# Altium PCB PCBdraft1.PcbDoc
Units mm, origin at the board's own origin, x right, y up, seen from the top; angles counter-clockwise.
Board outline 100 x 100 mm, 2 copper layers (Top Layer, Bottom Layer); 11 components, 31 nets, 128 pads, 9 vias.
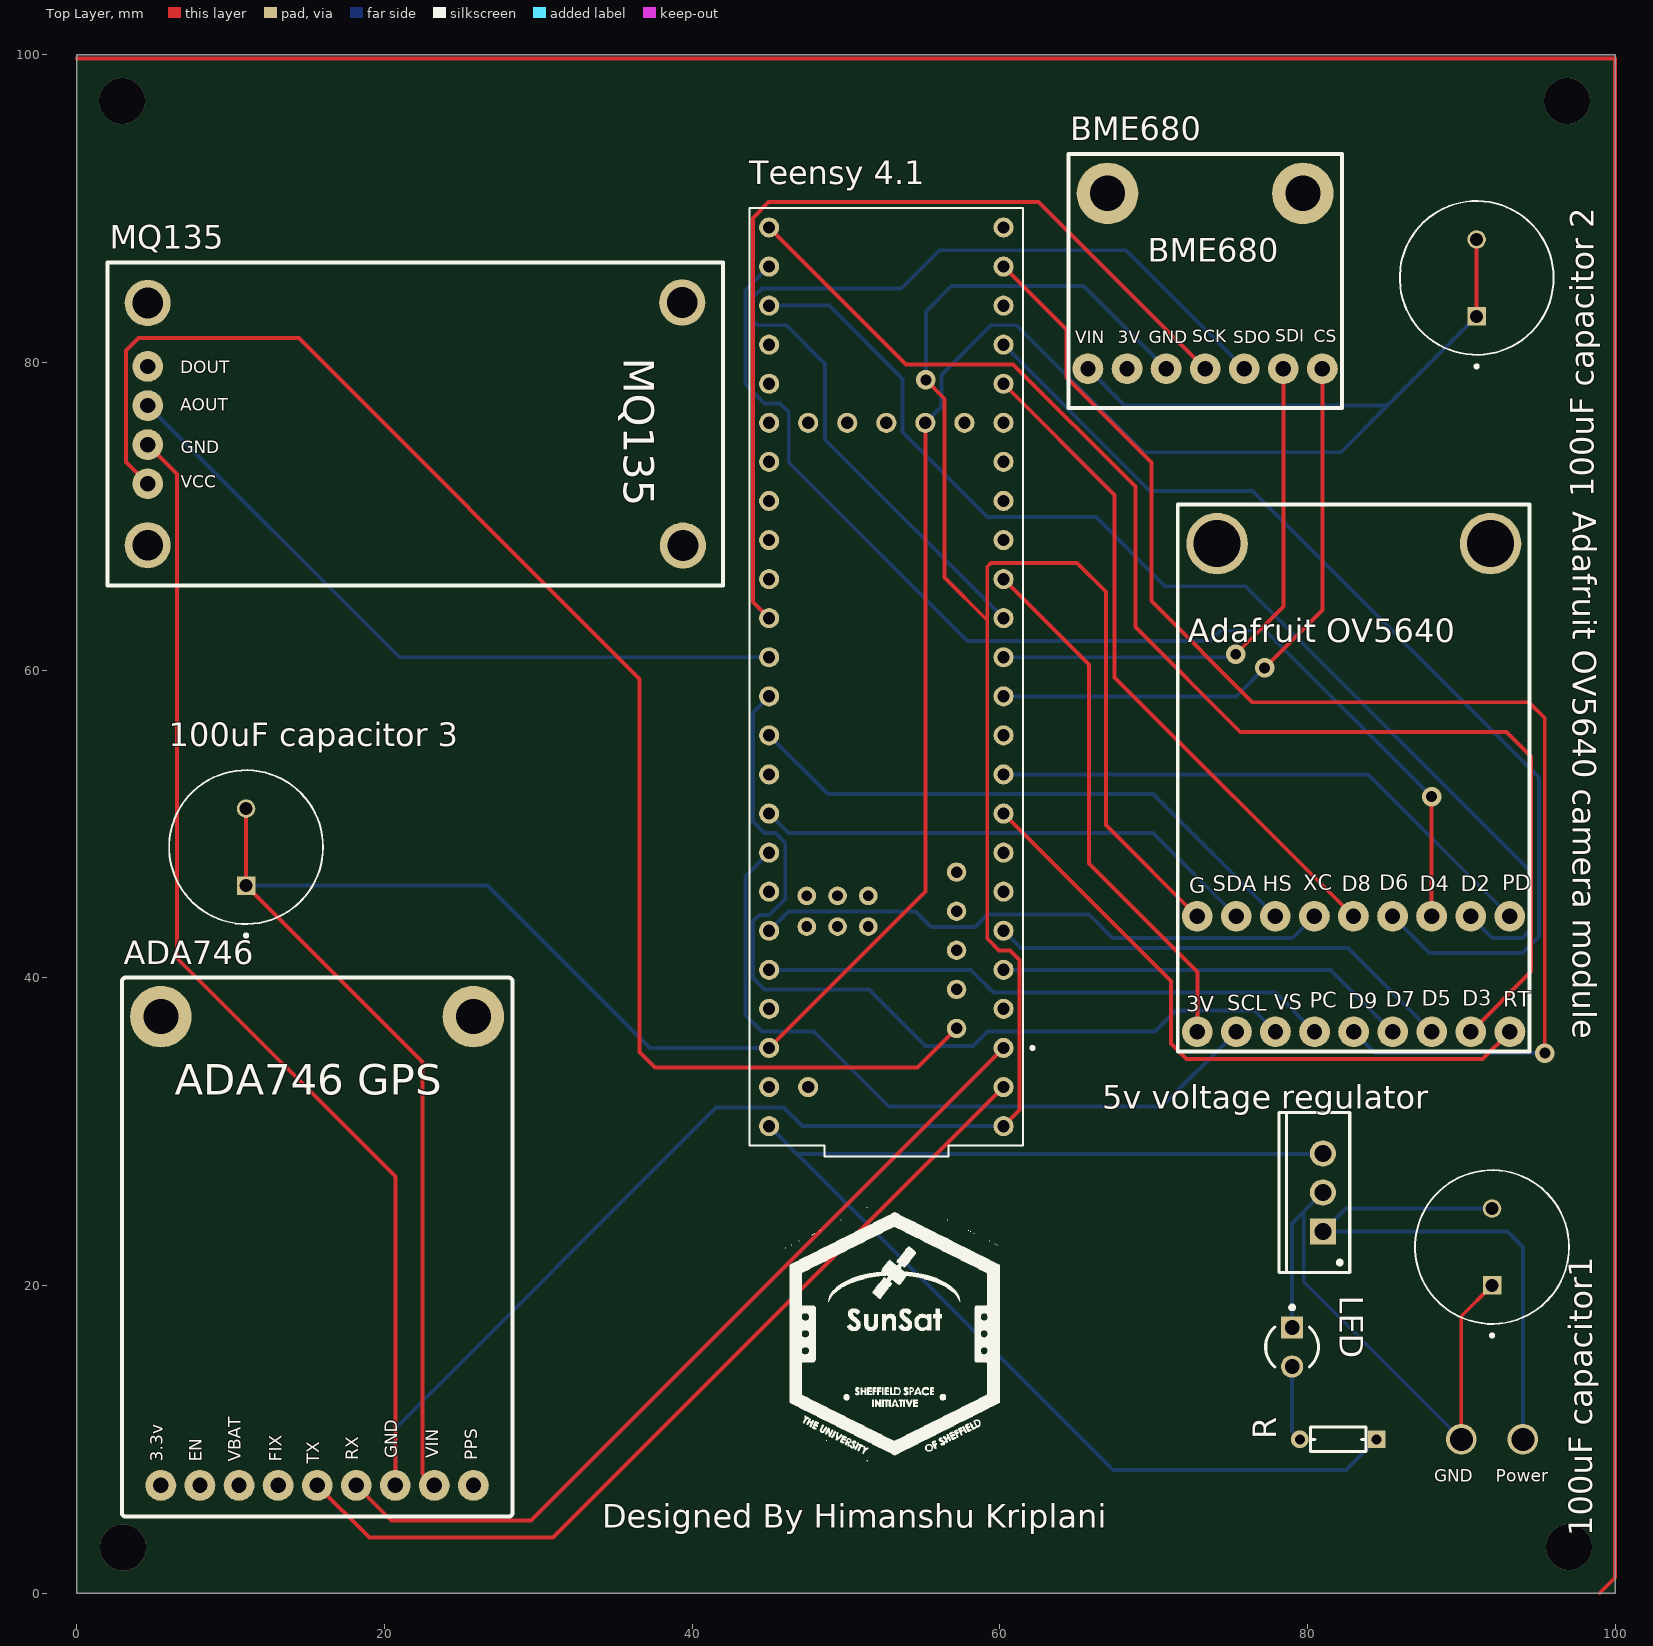
[diagram p0: Top Layer view]
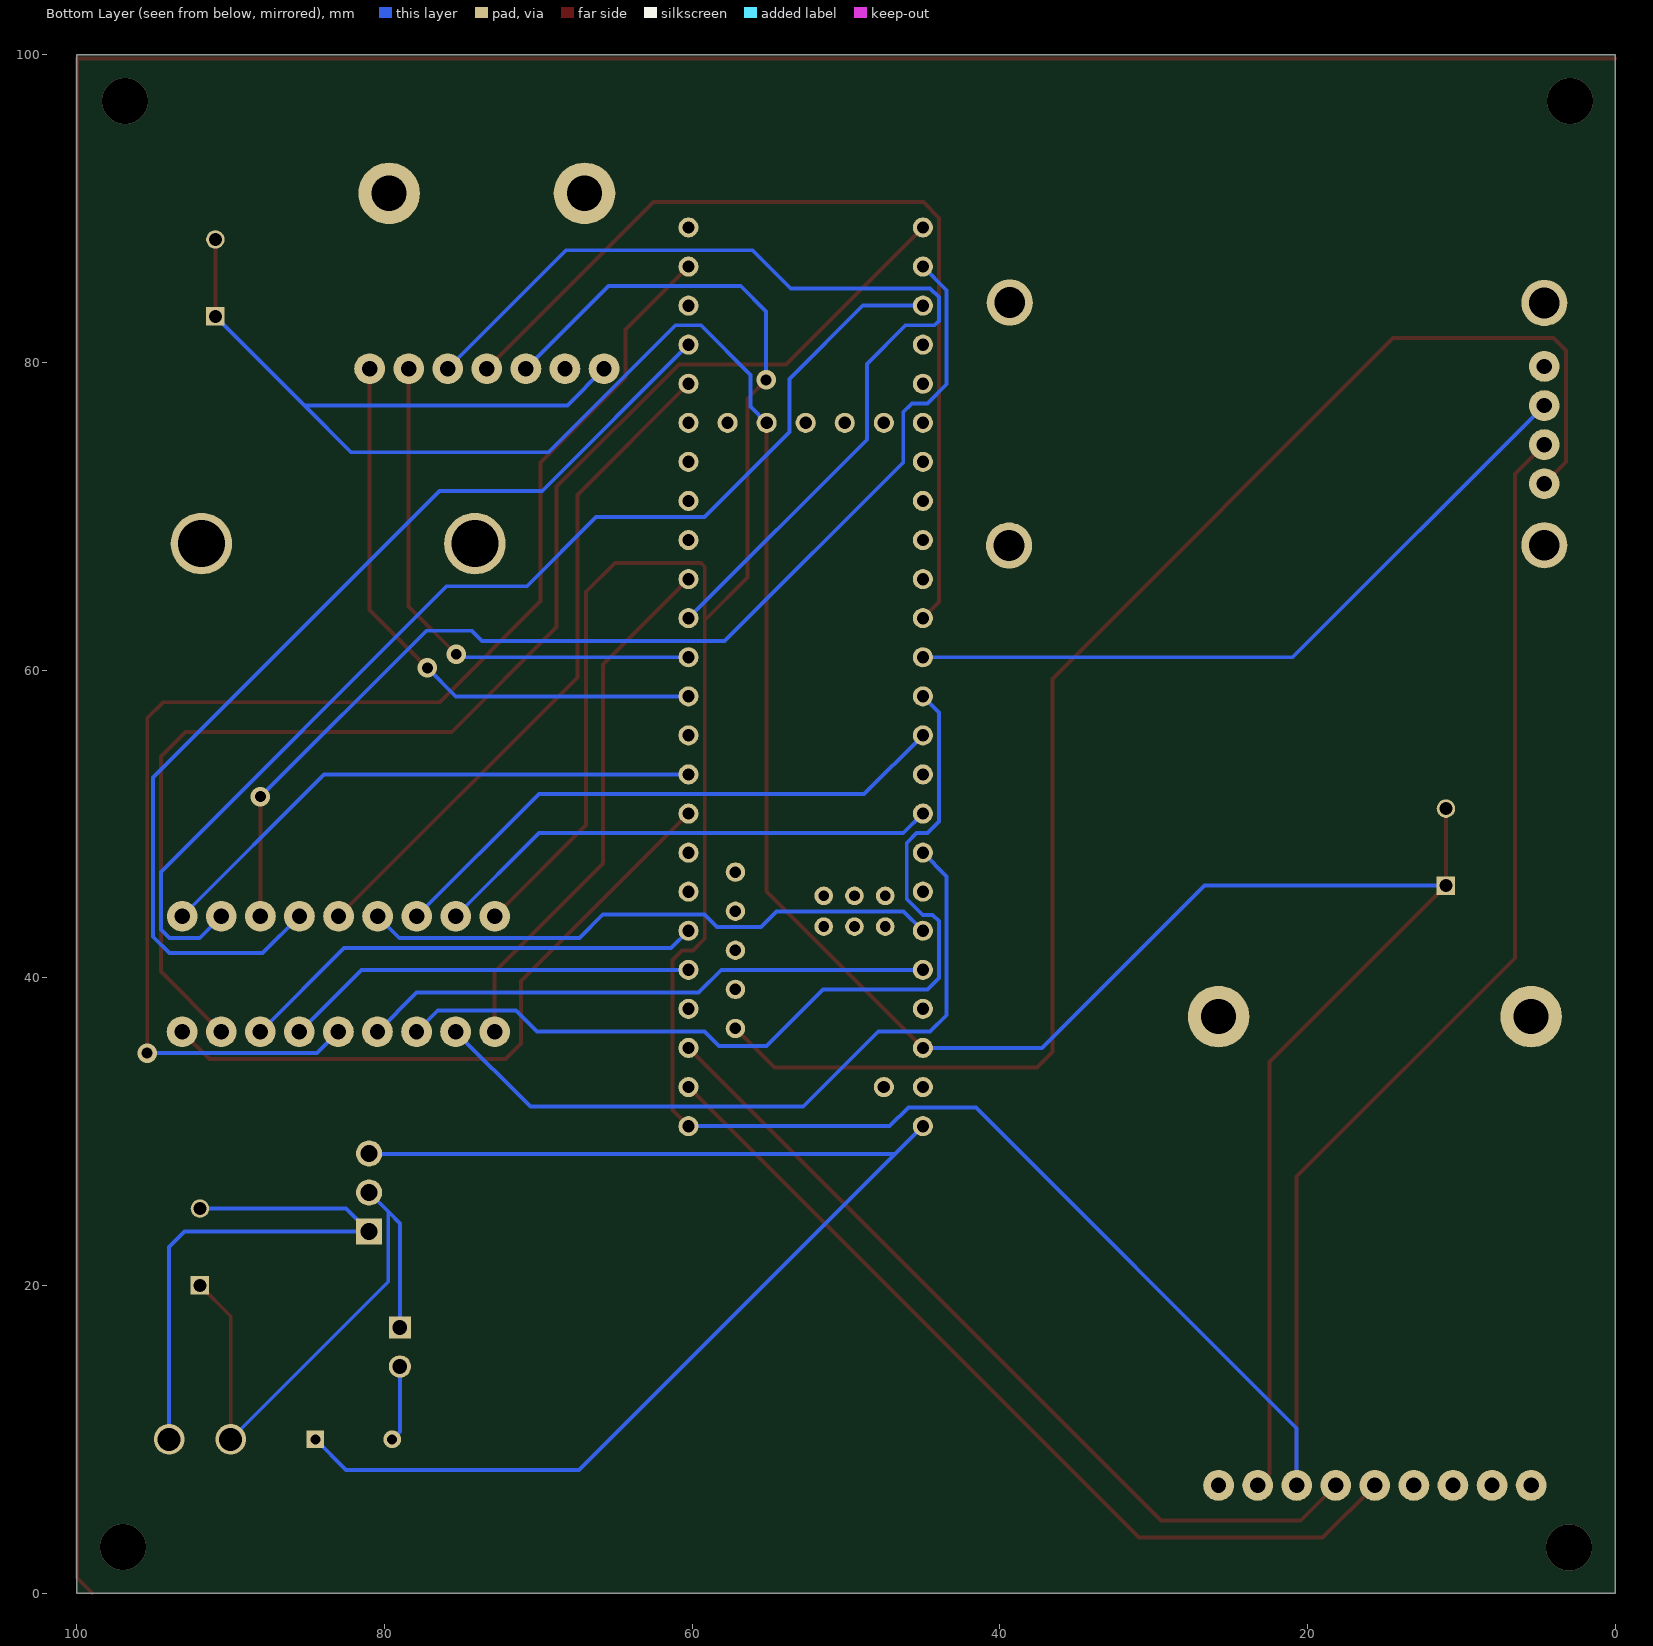
[diagram p1: Bottom Layer view, seen from below]
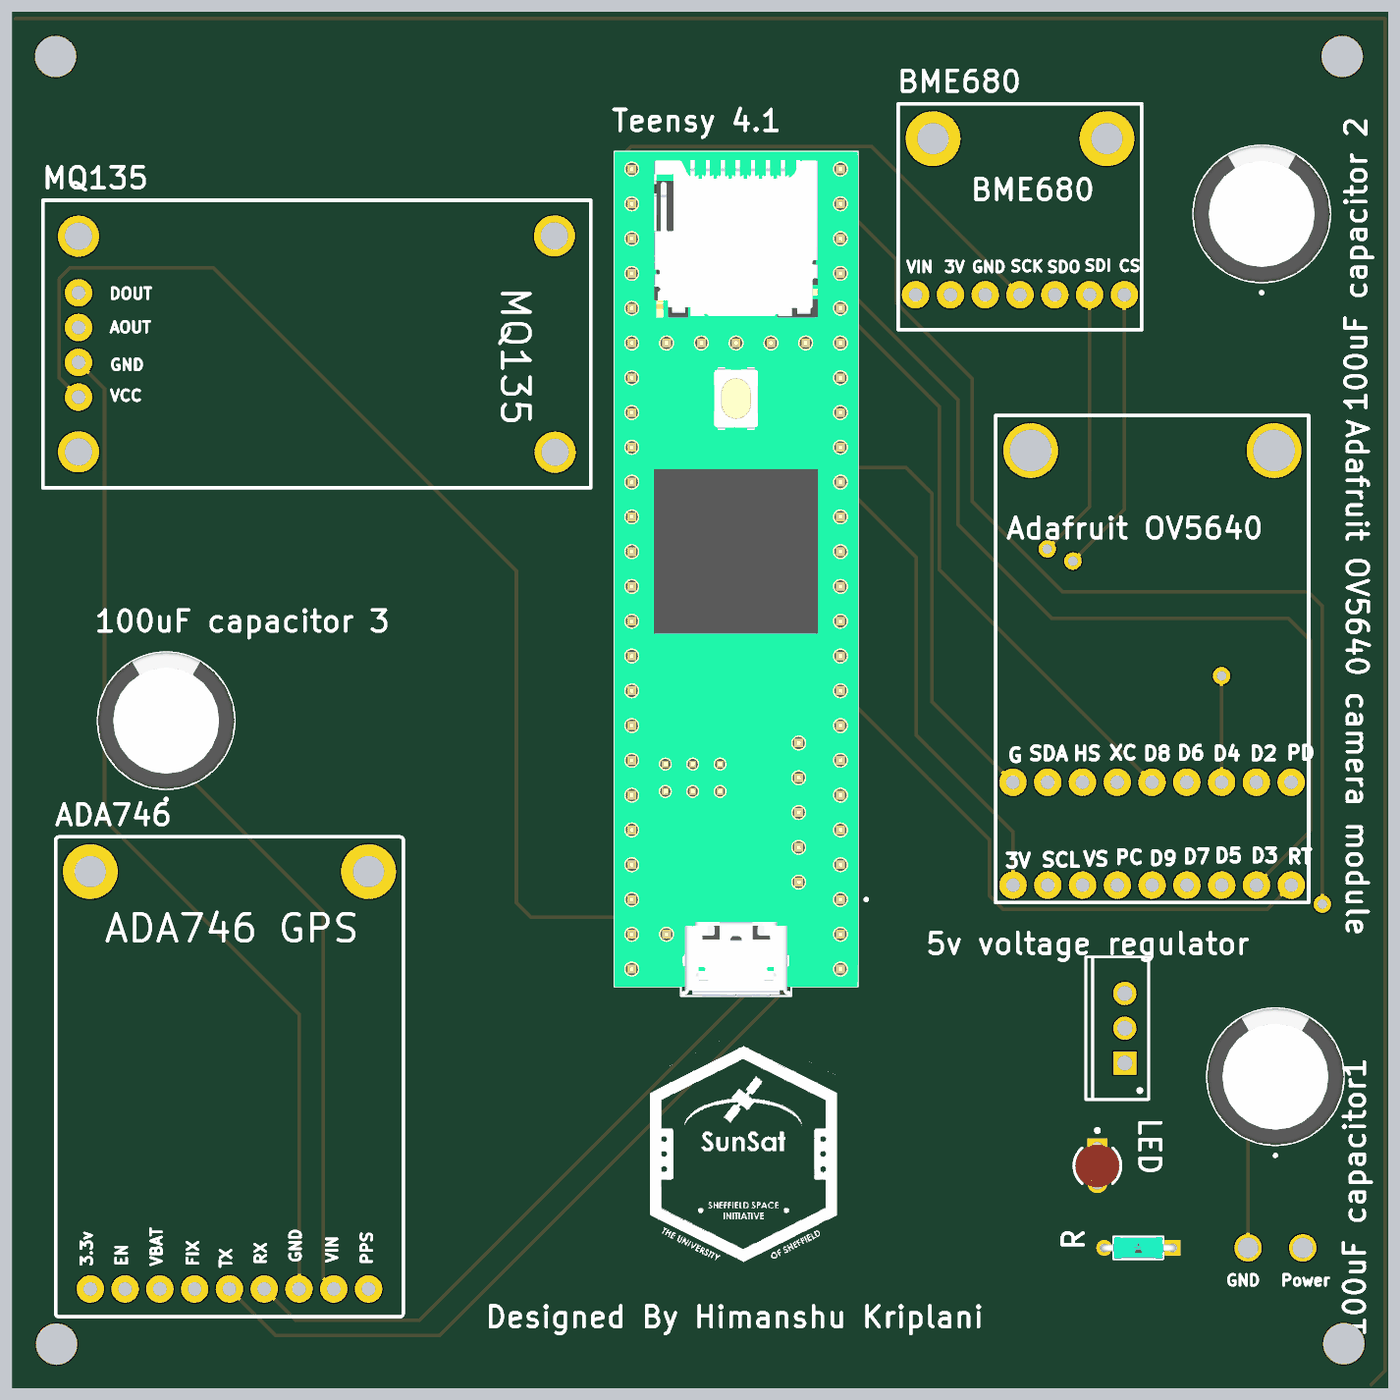
[diagram p2: 3D render of the assembled board from above, using the file's embedded part models]

## Layer stack, top to bottom
Top Solder: solder mask 0.0102, Solder Resist, Dk 3.5
Top Layer: signal copper 0.0356
Dielectric 1: dielectric 0.32, FR-4, Dk 4.8
Bottom Layer: signal copper 0.0356
Bottom Solder: solder mask 0.0102, Solder Resist, Dk 3.5

## Board outline
0,0 100,0 100,100 0,100

## Design rules (kind name [scope] priority, off if disabled: settings)
Clearance [All] p1: gap=0.254 ignorepadtopadclearanceinfootprint=FALSE except(0: Arc-Hole Track-Hole SMDPad-Hole THPad-Hole Via-Hole Fill-Hole Poly-Hole Region-Hole Text-Hole)
PolygonConnect [All] p1: connectstyle=Relief reliefconductorwidth=0.254 reliefentries=4 polygonreliefangle="90 Angle" airgapwidth=0.254
RoomDefinition schematicdraft1 [InComponentClass('schematicdraft1')] p1: confinementstyle=ConfineIn formatcopy=TRUE lockcomponents=FALSE outline 5,30.5 176,30.5 176,97.5 5,97.5
RoomDefinition powercircuitschematicdraft1 [InComponentClass('powercircuitschematicdraft1')] p2: confinementstyle=ConfineIn formatcopy=TRUE lockcomponents=FALSE outline 32,6.04 87,6.04 87,22.04 32,22.04
RoutingVias [All] p1: holewidth=0.711 width=1.27 viastyle="Through Hole" minholewidth=0.711 minwidth=1.27 maxholewidth=0.711 maxwidth=1.27
SolderMaskExpansion [All] p1: expansion=0.102 istentingtop=FALSE
Width [All] p1: maxlimit=0.254 minlimit=0.254 preferedwidth=0.254
30 further rules are at their usual default settings.

## Classes and differential pairs
component class schematicdraft1: "100uF capacitor 2" "100uF capacitor 3" ADA746 "Adafruit OV5640 camera module" MQ135 "Teensy 4.1"
component class powercircuitschematicdraft1: "5v voltage regulator" 6v "100uF capacitor1" LED R

## Components (designator, comment, footprint, x,y, rotation, side; value= is the part's Value field where it differs from the comment)
"5v voltage regulator" "L4940V5" TO220 81,26.04 r90 top
"100uF capacitor1" "EEUTA1V101" CAPPRD500W60D1000H1250 92,22.5 r90 top
"100uF capacitor 2" "EEUTA1V101" CAPPRD500W60D1000H1250 91,85.5 r90 top
"100uF capacitor 3" "EEUTA1V101" CAPPRD500W60D1000H1250 11,48.5 r90 top
ADA746 "ADA746 GPS" "ADA746 GPS footprint" 15.62,22.494 r90 top
"Adafruit OV5640 camera module" "OV5640 adafruit camera" "OV5640 footprint" 83,53 r0 top
BME680 "BME680" "BME 680 footprint" 73.35,85.3 r0 top
LED "HLMP-1301" FP-HLMP-1301-MFG 79,16 r270 top
MQ135 "MQ135 sensor" "MQ135 footprint" 22,76 r0 top
R "MBA02040C2200FC100" FP-MBA0204-MFG 82,10 r180 top value=220Ω
"Teensy 4.1" "Teensy 4.1" MODULE_DEV-16771 52.62,59.57 r90 top

## Footprints (in the part's own frame and the unit in brackets; to place one, negate y for a bottom-side part, rotate by r counter-clockwise, add the part's x,y. Pads: shape width x height; smd on the part's side, far side on the other; paste and mask are expansions set on the pad)
"ADA746 GPS footprint" [mm]
  round 2 hole 1: 1(-15.494,10.16) 2(-15.494,7.62) 3(-15.494,5.08) 4(-15.494,2.54) 5(-15.494,0) 6(-15.494,-2.54) 7(-15.494,-5.08) 8(-15.494,-7.62) 9(-15.494,-10.16)
  round 4 hole 2.286: THRU3(14.986,10.16) THRU4(14.986,-10.16)
  silkscreen extent -17.52,-12.7 17.52,12.7
"BME 680 footprint" [mm]
  round 2 hole 1: 3V(-5.08,-5.7) CS(7.62,-5.7) GND(-2.54,-5.7) SCK(0,-5.7) SDI(5.08,-5.7) SDO(2.54,-5.7) Vin(-7.62,-5.7)
  round 4 hole 2.286: THRU1(-6.35,5.7) THRU2(6.35,5.7)
  silkscreen extent -8.89,-8.25 8.89,8.26
CAPPRD500W60D1000H1250 [mm]
  round 1.2 hole 0.85: N(2.5,0)
  rect 1.2x1.2 hole 0.85: P(-2.5,0)
  silkscreen extent -5.85,-5 5,5, body extent -5,-5 5,5, height 12.5
FP-HLMP-1301-MFG [mm]
  rect 1.45x1.45 hole 0.95 paste-1000 mask+0: 1(-1.27,0)
  round 1.45 hole 0.95 paste-1000 mask+0: 2(1.27,0)
  silkscreen extent -2.7,-1.71 1.3,1.71, body extent -2.22,-2.22 2.22,2.22, height 0.25
FP-MBA0204-MFG [mm]
  rect 1.15x1.15 hole 0.65 paste-1000 mask+0: 1(-2.5,0)
  round 1.15 hole 0.65 paste-1000 mask+0: 2(2.5,0)
  silkscreen extent -1.8,-0.8 1.8,0.8, body extent -3.17,-0.9 3.17,0.9, height 0.25
MODULE_DEV-16771 [mm]
  round 1.308 hole 0.8: 0(-26.67,-7.62) 1(-24.13,-7.62) 2(-21.59,-7.62) 3(-19.05,-7.62) 3.3V_1(6.35,-7.62) 3.3V_2(-24.13,7.62) 3.3V_3(16.51,-2.54) 4(-16.51,-7.62) 5(-13.97,-7.62) 6(-11.43,-7.62) 7(-8.89,-7.62) 8(-6.35,-7.62) 9(-3.81,-7.62) 10(-1.27,-7.62) 11(1.27,-7.62) 12(3.81,-7.62) 13(3.81,7.62) 14(1.27,7.62) 15(-1.27,7.62) 16(-3.81,7.62) 17(-6.35,7.62) 18(-8.89,7.62) 19(-11.43,7.62) 20(-13.97,7.62) 21(-16.51,7.62) 22(-19.05,7.62) 23(-21.59,7.62) 24(8.89,-7.62) 25(11.43,-7.62) 26(13.97,-7.62) 27(16.51,-7.62) 28(19.05,-7.62) 29(21.59,-7.62) 30(24.13,-7.62) 31(26.67,-7.62) 32(29.21,-7.62) 33(29.21,7.62) 34(26.67,7.62) 35(24.13,7.62) 36(21.59,7.62) 37(19.05,7.62) 38(16.51,7.62) 39(13.97,7.62) 40(11.43,7.62) 41(8.89,7.62) GND1(-29.21,-7.62) GND2(6.35,7.62) GND3(-26.67,7.62) GND4(16.51,0) ON/OFF(16.51,5.08) PROGRAM(16.51,2.54) VBAT(16.51,-5.08) VIN(-29.21,7.62) VUSB(-26.67,5.08)
  round 1.258 hole 0.75: 5V(-22.86,-4.57) D+(-17.78,-4.57) D-(-20.32,-4.57) USB_GND1(-15.24,-4.57) USB_GND2(-12.7,-4.57)
  round 1.208 hole 0.7: GND5(-14.24,3.17) LED(-16.24,3.17) R+(-16.24,5.17) R-(-14.24,5.17) T+(-14.24,1.17) T-(-16.24,1.17)
  silkscreen extent -31.18,-9.6 30.48,8.89, body extent -31.18,-8.89 30.48,8.89, height 7.15
"MQ135 footprint" [mm]
  round 2 hole 1: AOUT(-17.4,1.205) DOUT(-17.4,3.745) GND(-17.4,-1.335) VCC(-17.4,-3.875)
  round 3 hole 2: THRU5(-17.4,7.875) THRU6(-17.4,-7.875) THRU7(17.35,7.9) THRU8(17.4,-7.9)
  silkscreen extent -20,-10.5 20,10.5
"OV5640 footprint" [mm]
  round 2 hole 1: 3V(-10.16,-16.51) D2(7.61,-9) D3(7.62,-16.51) D4(5.07,-9) D5(5.08,-16.51) D6(2.53,-9) D7(2.54,-16.51) D8(-0.01,-9) D9(0,-16.51) G(-10.17,-9) HS(-5.09,-9) PC(-2.54,-16.51) PD(10.15,-9) RT(10.16,-16.51) SCL(-7.62,-16.51) SDA(-7.63,-9) VS(-5.08,-16.51) XC(-2.55,-9)
  round 4 hole 3.048: THR10(8.9,15.225) THRU9(-8.875,15.225)
  silkscreen extent -11.43,-17.78 11.43,17.78
TO220 [mm] "TO, Thru-Hole, Vertical, Heatsink Mounted; 3 In-Line Leads; Pitch 2.54 mm"
  rect 1.7x1.7 hole 1.1: 1(-2.54,0)
  round 1.7 hole 1.1: 2(0,0) 3(2.54,0)
  silkscreen extent -5.2,-1.75 5.2,2.85, body extent -5.25,-1.8 5.25,2.9, height 19.7

## Part data
"5v voltage regulator": library part CMP-0244-00429-1, "1.5A Very Low Drop Regulator, 3-Pin TO-220", ComponentLink1Description="Manufacturer URL", ComponentLink1URL=http://www.st.com, ComponentLink2Description=Datasheet, ComponentLink2URL=http://www.st.com/internet/com/TECHNICAL_RESOURCES/TECHNICAL_LITERATURE/DATASHEET/CD00000442.pdf, ComponentLink3Description="Package Specification", ComponentLink3URL=http://www.st.com/internet/com/TECHNICAL_RESOURCES/TECHNICAL_LITERATURE/PACKAGE_INFORMATION/CD00004649.pdf, DatasheetVersion=16/12/2009, PackageDescription="TO, Thru-Hole, Vertical, Heatsink Mounted; 3 In-Line Leads; Pitch 2.54 mm", PackageReference=TO220, PackageVersion=ver3.0
"100uF capacitor1" "100uF capacitor 2" "100uF capacitor 3": library part CMP-007-000000-1, "CAP ALUM 100UF 20% 35V RADIAL", Package="RADIAL-2 Panasonic", Availability="In Stock", Check_prices=https://www.snapeda.com/parts/EEUTA1V101/Panasonic/view-part/5783936/?ref=eda, Component Type=Standard, Design Item ID=EEUTA1V101, MF=Panasonic, MP=EEUTA1V101, Pin Count=2, Price=None, SnapEDA_Link=https://www.snapeda.com/parts/EEUTA1V101/Panasonic/view-part/5783936/?ref=snap, Source=EEUTA1V101.SchLib
ADA746: library part CMP-010-00025-3, "I created this library because I didnot find an existing one"
"Adafruit OV5640 camera module": library part CMP-010-00028-3, "Adafruit OV5640 camera"
BME680: library part CMP-010-00024-6, "Temperature and pressure sensor"
LED: library part CMP-18399-000007-1, "LED RED DIFFUSED T-1 T/H", Colour=Red, Forward Current=10mA, Forward Voltage=1.9V, Manufacturer=Broadcom, Max Junction Temp=+110°C, Package=0, Reverse Voltage=5V, Temperature="-40°C to +100°C", Temperature Range High=+100°C, Temperature Range Low=-40°C, Automotive=No, Category=Diode, ComponentLink2Description=Datasheet, ComponentLink2URL=https://docs.broadcom.com/docs/AV02-1555EN, Device Class L1=Optoelectronics, Device Class L2=LEDs, Device Class L3=unset, Digikey Description="LED RED DIFFUSED T-1 T/H", Lead Free=Yes, Led Orientation=Straight, Luminous Intensity=3.4mcd, Manufacturer Part Number=HLMP-1301, Mouser Description="Standard LEDs - Through Hole Red Diffused 635nm 3.4mcd", Octopart=https://octopart.com/hlmp-1301-broadcom-71130345, Peak Emmision Wavelength=635nm, RoHS=TRUE, Viewing Angle=60°, Wavelength=626nm
MQ135: library part CMP-010-00026-3, "New schematic and footprint for the MQ135 CO2 sensor"
R: library part CMP-02408-000005-1, "RES 220 OHM 0.4W 1% AXIAL", Manufacturer="Vishay BC Components", Package=MBA0204, Power Rating=0.25W, Resistance=220Ω, Temperature="-55°C to +125°C", Temperature Coefficient=50ppm/°C, Temperature Range High=+125°C, Temperature Range Low=-55°C, Tolerance=1%, Voltage Rating=200V, Automotive=Yes, Automotive Grade="Grade 1", Category=Res, ComponentLink2Description=Datasheet, ComponentLink2URL=http://www.vishay.com/docs/28766/mbxsma.pdf, Composition="Metal Film", Device Class L1="Passive Components", Device Class L2=Resistors, Device Class L3="Through-Hole Resistors", Digikey Description="RES 220 OHM 0.4W 1% AXIAL", Height=1.6mm, Ipc Land Pattern Name=RESAD500W65L360D160, Lead Free=Yes, Manufacturer Part Number=MBA02040C2200FC100, Mouser Description="Thin Film Resistors - Through Hole .4watt 220ohms 1% 1/8watt body size", Octopart=https://octopart.com/mba02040c2200fc100-vishay-43743094, RoHS=TRUE, Series="MBA/SMA 0204"
"Teensy 4.1": library part CMP-003-000000-1, "RT1062 Teensy 4.1 series ARMÂ® CortexÂ®-M7 MPU Embedded Evaluation Board", Package=None, Availability="In Stock", Check_prices=https://www.snapeda.com/parts/DEV-16771/SparkFun+Electronics/view-part/?ref=eda, Component Type=Standard, Design Item ID=DEV-16771, MF="SparkFun Electronics", MP=DEV-16771, Pin Count=65, Price=None, Purchase-URL=https://pricing.snapeda.com/search/part/DEV-16771/?ref=eda, SnapEDA_Link=https://www.snapeda.com/parts/DEV-16771/SparkFun+Electronics/view-part/?ref=snap, Source=DEV-16771.SchLib

## Free pads (board coordinates)
  round 2 hole 1.5: Ground(90,10) Power(94,10)

## Via types
v1: diameter 1.27, hole 0.711, Top Layer to Bottom Layer, 5 vias
v2: diameter 3, hole 3, Top Layer to Bottom Layer, 4 vias

## Nets (pads, with @x,y where several pads share a name; then routed paths per layer and width w, separated by ;. In a path a pad name is that pad's centre, name@x,y a point inside that pad or via, vN(x,y) a via of type N, cw(c..) or ccw(c..) an arc to the next point about the centre after c; other vN are vias at no path point)
GND: "5v voltage regulator.2" "100uF capacitor1.P" LED.1 pad.Ground | length 39.5
  Top Layer w0.254: pad.Ground 90,18 92,20
  Bottom Layer w0.254: LED.1 79,24.04 79.756,24.796 ; 81,26.04 79.756,24.796 ; pad.Ground 79.756,20.244 79.756,24.796
"Net5v voltage regulator_1": "5v voltage regulator.1" "100uF capacitor1.N" pad.Power | length 37.5
  Bottom Layer w0.254: 92,25 82.5,25 81,23.5 93,23.5 94,22.5 pad.Power
"Net5v voltage regulator_3": "5v voltage regulator.3" "Teensy 4.1.VIN" R.1 | length 83.8
  Bottom Layer w0.254: 45,30.36 46.82,28.54 ; 81,28.58 81,28.54 46.82,28.54 ; R.1 82.5,8 67.36,8 46.82,28.54
"Net100uF capacitor 2_N": "100uF capacitor 2.N" "100uF capacitor 2.P" "100uF capacitor 3.N" "100uF capacitor 3.P" "Teensy 4.1.3.3V_2" "Teensy 4.1.3.3V_3" ADA746.8 BME680.Vin | length 204.5
  Top Layer w0.254: 11,51 11,46 22.479,34.521 22.479,7.761 ADA746.8 ; 45,35.44 55.16,45.6 55.16,76.08 ; 91,83 91,88
  Bottom Layer w0.254: 11,46 26.695,46 37.255,35.44 45,35.44 ; 55.16,76.08 56.213,77.133 56.213,79.2 59.436,82.423 61.087,82.423 69.342,74.168 82.168,74.168 85.216,77.216 ; BME680.Vin 68.114,77.216 85.216,77.216 ; 91,83 85.216,77.216
NetADA746_5: "Teensy 4.1.0" ADA746.5 | length 58.2
  Top Layer w0.254: ADA746.5 19.013,3.607 30.947,3.607 60.24,32.9
NetADA746_6: "Teensy 4.1.1" ADA746.6 | length 55.7
  Top Layer w0.254: ADA746.6 20.436,4.724 29.524,4.724 60.24,35.44
NetADA746_7: "Adafruit OV5640 camera module.G" "Teensy 4.1.GND1" ADA746.7 BME680.GND MQ135.GND | length 237.2
  Top Layer w0.254: MQ135.GND 6.502,72.763 6.502,41.275 20.7,27.077 ADA746.7 ; v1(55.194,78.867) 56.413,77.648 56.413,66.015 59.182,63.246 ; 60.24,30.36 61.29,31.41 61.29,41.148 60.655,41.783 59.944,41.783 59.182,42.545 59.182,63.246 ; 72.83,44 66.904,49.926 66.904,65.1 65.024,66.98 59.436,66.98 59.182,66.726 59.182,63.246
  Bottom Layer w0.254: ADA746.7 20.7,10.718 41.554,31.572 45.949,31.572 47.161,30.36 60.24,30.36 ; v1(55.194,78.867) 55.194,83.312 56.845,84.963 65.447,84.963 BME680.GND
"NetAdafruit OV5640 camera module_3V": "Adafruit OV5640 camera module.3V" "Teensy 4.1.3.3V_1" | length 34.6
  Top Layer w0.254: 60.24,65.92 65.786,60.374 65.786,47.422 72.84,40.368 72.84,36.49
"NetAdafruit OV5640 camera module_D2": "Adafruit OV5640 camera module.D2" "Teensy 4.1.35" | length 75.3
  Bottom Layer w0.254: 45,83.7 48.913,83.7 53.673,78.94 53.673,75.486 59.207,69.952 66.243,69.952 70.739,65.456 75.971,65.456 94.539,46.888 94.539,43.155 93.98,42.596 92.014,42.596 90.61,44
"NetAdafruit OV5640 camera module_D3": "Adafruit OV5640 camera module.D3" "Teensy 4.1.33" | length 88.6
  Top Layer w0.254: 45,88.78 53.897,79.883 60.858,79.883 68.809,71.933 68.809,62.803 75.63,55.982 92.939,55.982 94.539,54.381 94.539,40.409 90.62,36.49
"NetAdafruit OV5640 camera module_D4": "Adafruit OV5640 camera module.D4" "Teensy 4.1.34" | length 74.3
  Top Layer w0.254: 88.07,44 v1(88.07,51.779)
  Bottom Layer w0.254: 45,86.24 43.457,84.697 43.457,78.59 44.704,77.343 45.72,77.343 46.279,76.784 46.279,73.508 57.887,61.9 73.66,61.9 74.32,62.56 77.288,62.56 v1(88.07,51.779)
"NetAdafruit OV5640 camera module_D5": "Adafruit OV5640 camera module.D5" "Teensy 4.1.4" | length 30.6
  Bottom Layer w0.254: 60.24,43.06 61.365,41.935 82.635,41.935 88.08,36.49
"NetAdafruit OV5640 camera module_D6": "Adafruit OV5640 camera module.D6" "Teensy 4.1.29" | length 67.8
  Bottom Layer w0.254: 60.24,81.16 69.747,71.653 76.429,71.653 95.047,53.035 95.047,42.672 93.98,41.605 87.925,41.605 85.53,44
"NetAdafruit OV5640 camera module_D7": "Adafruit OV5640 camera module.D7" "Teensy 4.1.3" | length 27
  Bottom Layer w0.254: 60.24,40.52 81.51,40.52 85.54,36.49
"NetAdafruit OV5640 camera module_D8": "Adafruit OV5640 camera module.D8" "Teensy 4.1.28" | length 44
  Top Layer w0.254: 60.24,78.62 67.462,71.398 67.462,59.528 82.99,44
"NetAdafruit OV5640 camera module_D9": "Adafruit OV5640 camera module.D9" "Teensy 4.1.31" | length 89.2
  Top Layer w0.254: 60.24,86.24 64.338,82.142 64.338,79.019 69.85,73.508 69.85,64.491 76.429,57.912 94.412,57.912 95.428,56.896 v1(95.428,35.103)
  Bottom Layer w0.254: 83,36.49 84.387,35.103 v1(95.428,35.103)
"NetAdafruit OV5640 camera module_HS": "Adafruit OV5640 camera module.HS" "Teensy 4.1.16" | length 37.8
  Bottom Layer w0.254: 45,55.76 48.817,51.943 69.967,51.943 77.91,44
"NetAdafruit OV5640 camera module_PC": "Adafruit OV5640 camera module.PC" "Teensy 4.1.22" | length 37.1
  Bottom Layer w0.254: 45,40.52 58.108,40.52 59.588,39.04 77.91,39.04 80.46,36.49
"NetAdafruit OV5640 camera module_PD": "Adafruit OV5640 camera module.PD" "Teensy 4.1.8" | length 36.7
  Bottom Layer w0.254: 60.24,53.22 83.93,53.22 93.15,44
"NetAdafruit OV5640 camera module_RT": "Adafruit OV5640 camera module.RT" "Teensy 4.1.7" | length 42.6
  Top Layer w0.254: 60.24,50.68 71.12,39.8 71.12,35.738 72.136,34.722 91.392,34.722 93.16,36.49
"NetAdafruit OV5640 camera module_SCL": "Adafruit OV5640 camera module.SCL" "Teensy 4.1.19" | length 47.6
  Bottom Layer w0.254: 45,48.14 43.457,46.597 43.457,37.569 44.526,36.5 47.904,36.5 52.781,31.623 70.513,31.623 75.38,36.49
"NetAdafruit OV5640 camera module_SDA": "Adafruit OV5640 camera module.SDA" "Teensy 4.1.18" | length 33.1
  Bottom Layer w0.254: 45,50.68 46.277,49.403 69.967,49.403 75.37,44
"NetAdafruit OV5640 camera module_VS": "Adafruit OV5640 camera module.VS" "Teensy 4.1.15" | length 58.6
  Bottom Layer w0.254: 45,58.3 43.942,57.242 43.942,50.165 44.704,49.403 45.415,49.403 46.05,48.768 46.05,45.136 45.009,44.095 44.372,44.095 43.965,43.688 43.965,39.982 44.704,39.243 51.486,39.243 55.169,35.56 58.268,35.56 59.207,36.5 70.079,36.5 71.45,37.871 76.539,37.871 77.92,36.49
"NetAdafruit OV5640 camera module_XC": "Adafruit OV5640 camera module.XC" "Teensy 4.1.21" | length 37.9
  Bottom Layer w0.254: 45,43.06 46.263,44.323 54.508,44.323 55.524,43.307 58.395,43.307 59.207,44.12 65.811,44.12 67.335,42.596 79.046,42.596 80.45,44
NetBME680_CS: "Teensy 4.1.10" BME680.CS | length 38.7
  Top Layer w0.254: v1(77.216,60.147) 80.97,63.901 BME680.CS
  Bottom Layer w0.254: 60.24,58.3 75.369,58.3 v1(77.216,60.147)
NetBME680_SCK: "Teensy 4.1.13" BME680.SCK | length 60.8
  Top Layer w0.254: 45,63.38 43.942,64.438 43.942,89.408 44.958,90.424 62.526,90.424 BME680.SCK
NetBME680_SDI: "Teensy 4.1.11" BME680.SDI | length 35
  Top Layer w0.254: v1(75.336,61.036) 78.43,64.13 BME680.SDI
  Bottom Layer w0.254: 60.24,60.84 75.14,60.84 v1(75.336,61.036)
NetBME680_SDO: "Teensy 4.1.12" BME680.SDO | length 65.1
  Bottom Layer w0.254: 60.24,63.38 48.641,74.979 48.641,79.908 46.126,82.423 44.247,82.423 43.965,82.705 43.965,84.249 44.526,84.811 53.594,84.811 56.083,87.3 68.19,87.3 BME680.SDO
NetLED_2: LED.2 R.2 | length 4.9
  Bottom Layer w0.254: LED.2 79,10.5 R.2
NetMQ135_AOUT: "Teensy 4.1.14" MQ135.AOUT | length 47.2
  Bottom Layer w0.254: MQ135.AOUT 20.965,60.84 45,60.84
NetMQ135_VCC: "Teensy 4.1.5V" MQ135.VCC | length 98.5
  Top Layer w0.254: MQ135.VCC 3.2,73.525 3.2,80.772 4.013,81.585 14.427,81.585 36.576,59.436 36.576,35.179 37.592,34.163 54.643,34.163 57.19,36.71
pads on no net: "Adafruit OV5640 camera module.THR10" "Adafruit OV5640 camera module.THRU9" "Teensy 4.1.2" "Teensy 4.1.5" "Teensy 4.1.6" "Teensy 4.1.9" "Teensy 4.1.17" "Teensy 4.1.20" "Teensy 4.1.23" "Teensy 4.1.24" "Teensy 4.1.25" "Teensy 4.1.26" "Teensy 4.1.27" "Teensy 4.1.30" "Teensy 4.1.32" "Teensy 4.1.36" "Teensy 4.1.37" "Teensy 4.1.38" "Teensy 4.1.39" "Teensy 4.1.40" "Teensy 4.1.41" "Teensy 4.1.D+" "Teensy 4.1.D-" "Teensy 4.1.GND2" "Teensy 4.1.GND3" "Teensy 4.1.GND4" "Teensy 4.1.GND5" "Teensy 4.1.LED" "Teensy 4.1.ON/OFF" "Teensy 4.1.PROGRAM" "Teensy 4.1.R+" "Teensy 4.1.R-" "Teensy 4.1.T+" "Teensy 4.1.T-" "Teensy 4.1.USB_GND1" "Teensy 4.1.USB_GND2" "Teensy 4.1.VBAT" "Teensy 4.1.VUSB" ADA746.1 ADA746.2 ADA746.3 ADA746.4 ADA746.9 ADA746.THRU3 ADA746.THRU4 BME680.3V BME680.THRU1 BME680.THRU2 MQ135.DOUT MQ135.THRU5 MQ135.THRU6 MQ135.THRU7 MQ135.THRU8
copper on no net: | length 200.2
  Top Layer w0.254: 0,99.767 100,99.767 100,1 99,0
  other v2: 3,2.975 97,3 2.925,97 96.875,97

## Silkscreen, mask and mechanical layers (free items; w line width, h text height)
Top Overlay:
  drawing of 78 lines, arcs and shapes, not listed
  text "GND" at 88.254,7.254 h0.8
  text "Power" at 92.254,7.254 h0.8
  text "Designed By Himanshu Kriplani" at 34.154,4.237 h1.52
Board Shape:
  lines w0.5: 0,100 100,100 100,0

## Text inside footprints (layer, text, board x,y; h text height)
ADA746: Top Overlay "PPS" at 26.034,8.651 h0.8 r90; Top Overlay "VIN" at 23.494,8.778 h0.8 r90; Top Overlay "GND" at 20.827,8.778 h0.8 r90; Top Overlay "RX" at 18.287,8.651 h0.8 r90; Top Overlay "TX" at 15.747,8.397 h0.8 r90; Top Overlay "FIX" at 13.334,8.524 h0.8 r90; Top Overlay "VBAT" at 10.667,8.524 h0.8 r90; Top Overlay "EN" at 8.127,8.524 h0.8 r90; Top Overlay "3.3v" at 5.587,8.524 h0.8 r90
"Adafruit OV5640 camera module": Top Overlay "G" at 72.329,45.504 h1; Top Overlay "D2" at 89.979,45.629 h1; Top Overlay "SDA" at 73.854,45.629 h1; Top Overlay "HS" at 77.079,45.629 h1; Top Overlay "XC" at 79.729,45.679 h1; Top Overlay "D8" at 82.229,45.629 h1; Top Overlay "PD" at 92.679,45.679 h1; Top Overlay "D4" at 87.304,45.629 h1; Top Overlay "D6" at 84.679,45.679 h1; Top Overlay "Adafruit OV5640" at 72.204,61.829 h1.52; Top Overlay "3V" at 72.129,37.804 h1; Top Overlay "SCL" at 74.779,37.854 h1; Top Overlay "VS" at 77.829,37.929 h1; Top Overlay "PC" at 80.154,38.054 h1; Top Overlay "D9" at 82.654,37.979 h1; Top Overlay "D7" at 85.104,38.104 h1; Top Overlay "D5" at 87.429,38.179 h1; Top Overlay "D3" at 90.054,38.179 h1; Top Overlay "RT" at 92.729,38.104 h1
BME680: Top Overlay "CS" at 80.404,81.329 h0.8; Top Overlay "SDI" at 77.904,81.354 h0.8; Top Overlay "SDO" at 75.179,81.254 h0.8; Top Overlay "SCK" at 72.504,81.304 h0.8; Top Overlay "GND" at 69.679,81.254 h0.8; Top Overlay "3V" at 67.679,81.254 h0.8; Top Overlay "VIN" at 64.904,81.254 h0.8
MQ135: Top Overlay "DOUT" at 6.704,79.304 h0.8; Top Overlay "AOUT" at 6.729,76.854 h0.8; Top Overlay "GND" at 6.754,74.104 h0.8; Top Overlay "VCC" at 6.754,71.854 h0.8